# Altium PCB Boost converter.pcbdoc
Units mil, origin at the board's own origin, x right, y up, seen from the top; angles counter-clockwise.
Board outline 2320 x 1960 mil, 2 copper layers (Top Layer, Bottom Layer); 7 components, 5 nets, 23 pads, 0 vias.
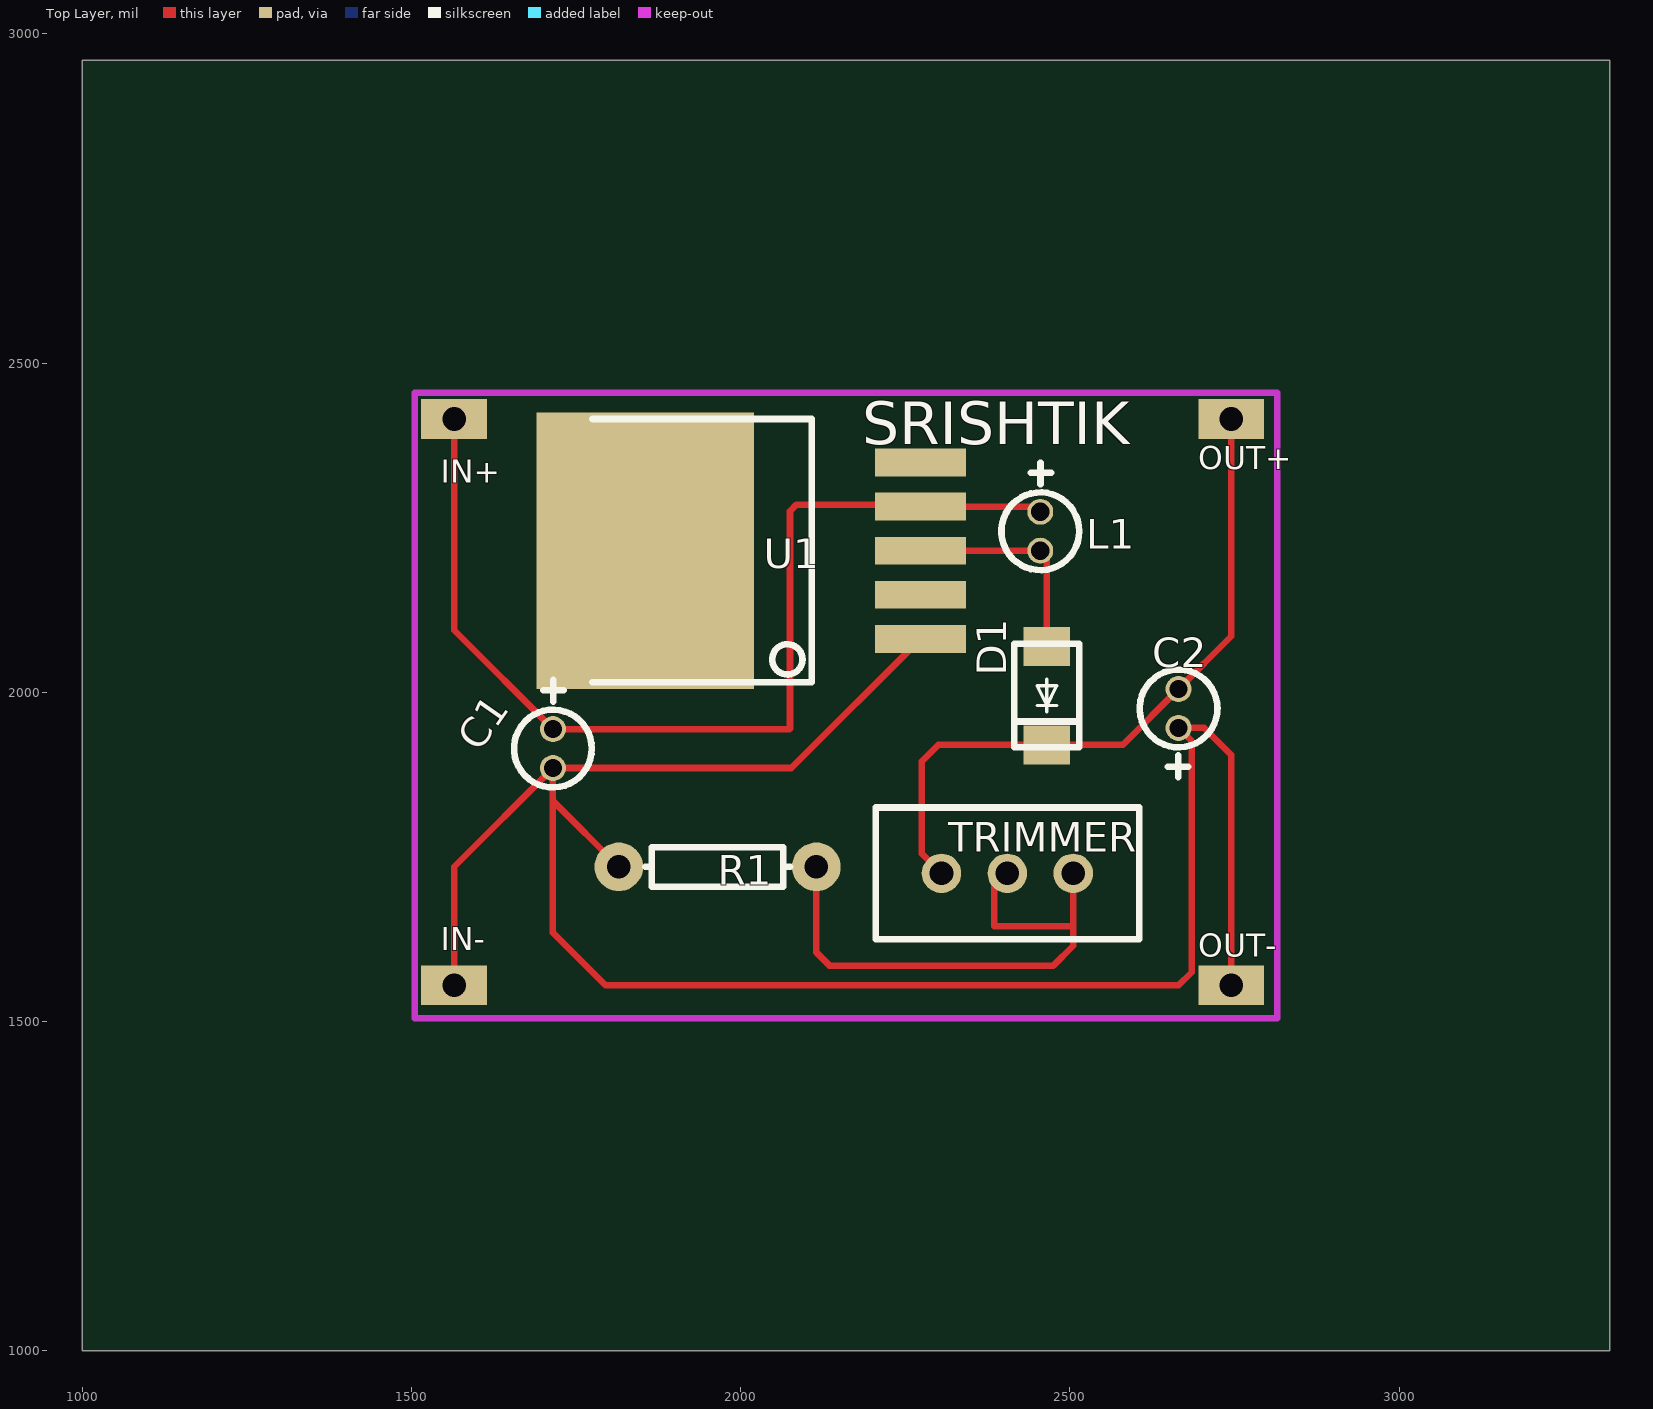
[diagram p0: Top Layer view]
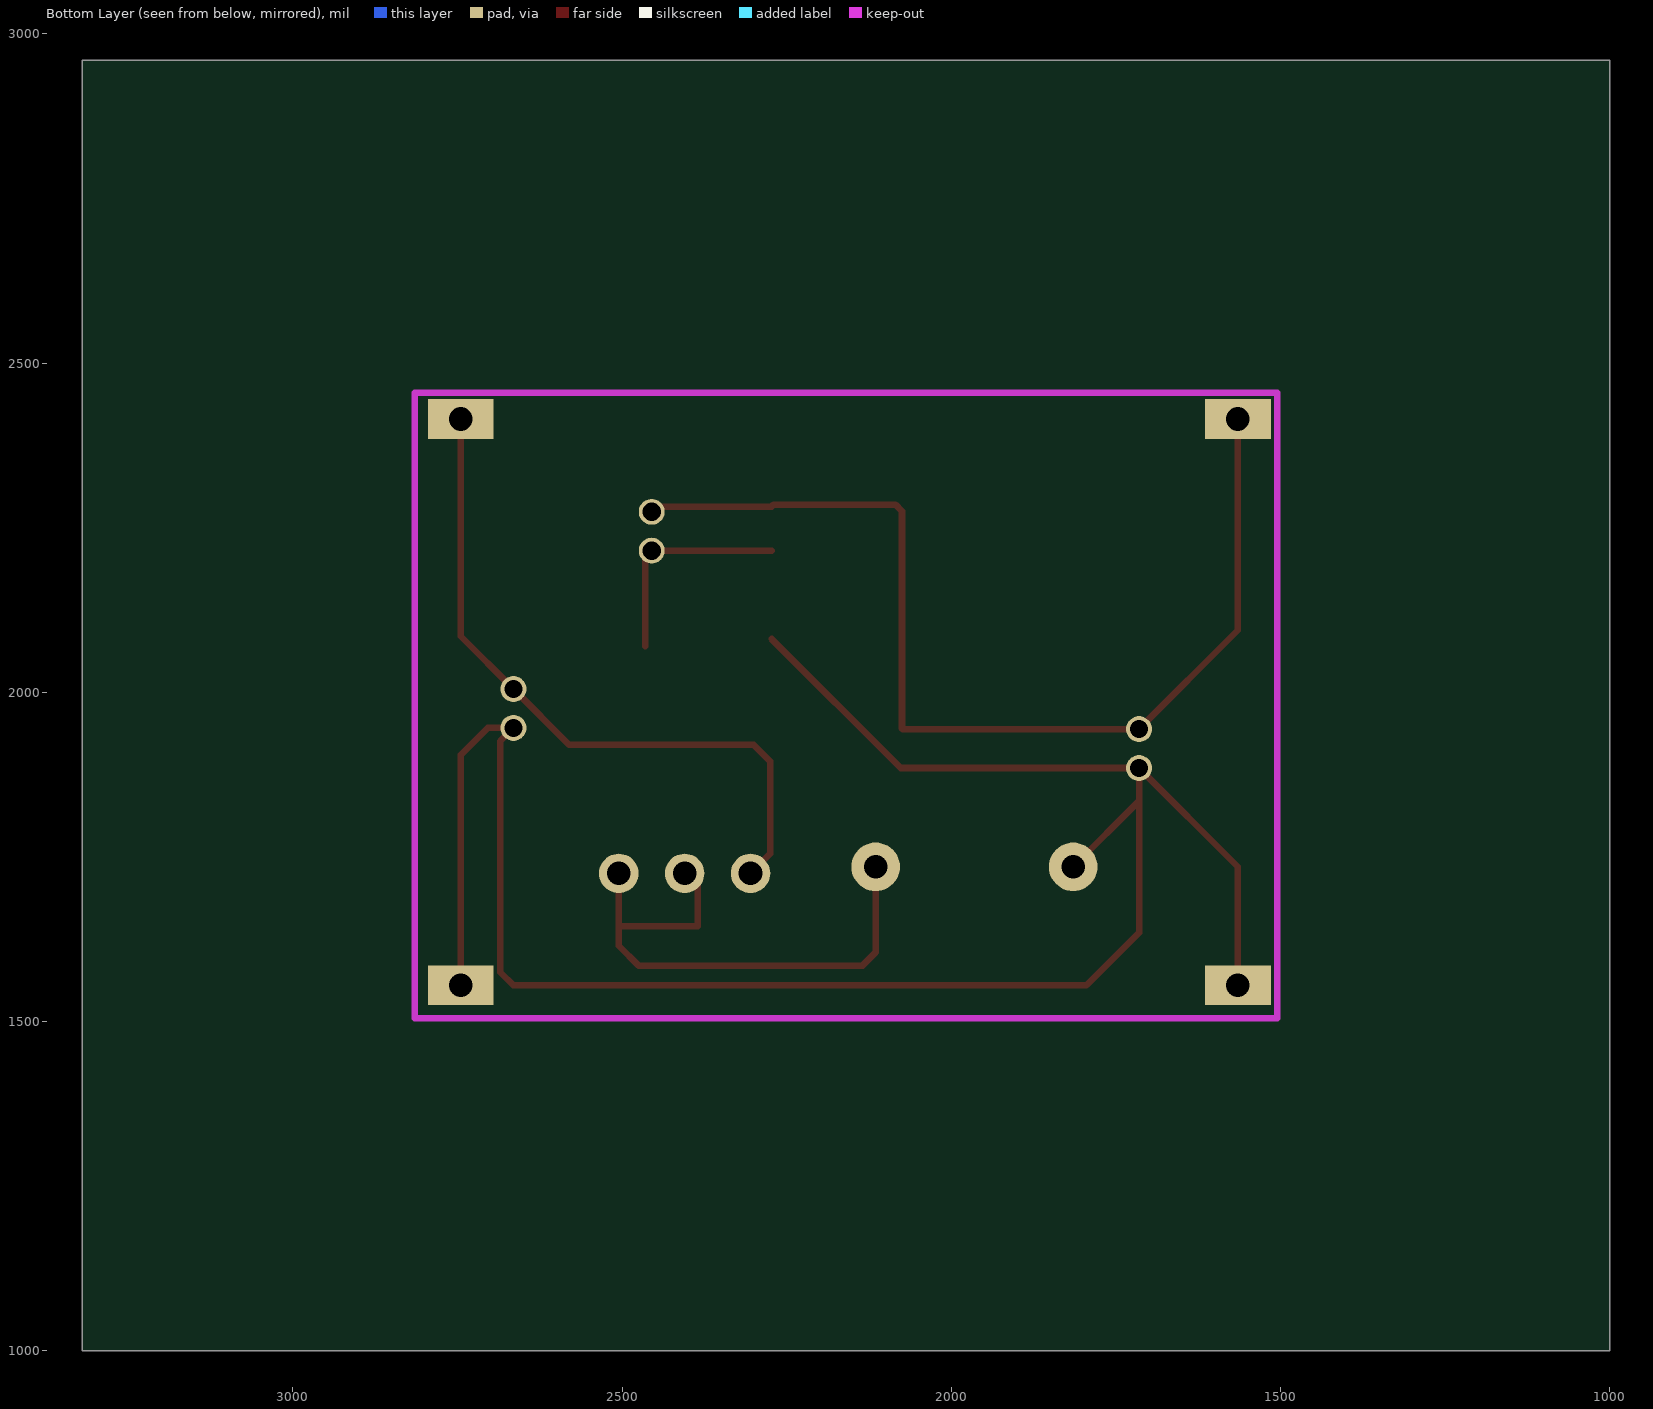
[diagram p1: Bottom Layer view, seen from below]

## Layer stack, top to bottom
Top Layer: signal copper (thickness not stored)
Dielectric: dielectric 12.6, FR-4, Dk 4.8
Bottom Layer: signal copper (thickness not stored)

## Board outline
3320,1000 1000,1000 1000,2960 3320,2960

## Components (designator, comment, footprint, x,y, rotation, side; value= is the part's Value field where it differs from the comment)
C1 "220uF" ?#1 1715,1885 r0 top
C2 "1u" ?#1 2665,2005 r180 top
D1 "SS34L RVG" ?#2 2465,1995 r270 top
L1 "33uH" ?#1 2455,2215 r0 top
R1 "1k" ?#3 2115,1735 r180 top
TRIMMER "TRIMMER" ?#4 2205,1825 r0 top
U1 "XL6009" ?#5 2255,2215 r0 top

## Footprints (in the part's own frame and the unit in brackets; to place one, negate y for a bottom-side part, rotate by r counter-clockwise, add the part's x,y. Pads: shape width x height; smd on the part's side, far side on the other; paste and mask are expansions set on the pad)
?#1 [mm]
  round 1 hole 0.7: 1(0,1.501) 2(0,0)
  silkscreen extent -1.5,-0.75 1.5,3.4
?#2 [mm]
  rect 1.5x1.8 smd: 1(-1.9,0) 2(1.9,0)
  silkscreen extent -2,-1.25 2,1.25
?#3 [mm]
  round 1.88 hole 0.899: 1(0,0) 2(7.62,0)
  silkscreen extent 1.02,-0.76 6.6,0.76
?#4 [mm]
  round 1.524 hole 0.914: 1(2.54,-2.54) 2(5.08,-2.54) 3(7.62,-2.54)
  silkscreen extent 0,-5.08 10.16,0
?#5 [mm]
  rect 3.5x1.069 smd: 1(0.457,-3.404) 2(0.457,-1.702) 3(0.457,0) 4(0.457,1.702) 5(0.457,3.404)
  rect 8.38x10.66 smd: 6(-10.16,0)
  silkscreen extent -12.19,-5.08 -3.73,5.08

## Free pads (board coordinates)
  rect 100x60 hole 36: 20(1565,2415) 21(1565,1555) 22(2745,2415) 23(2745,1555)

## Nets (pads, with @x,y where several pads share a name; then routed paths per layer and width w, separated by ;. In a path a pad name is that pad's centre, name@x,y a point inside that pad or via, vN(x,y) a via of type N, cw(c..) or ccw(c..) an arc to the next point about the centre after c; other vN are vias at no path point)
$BoardOutlineNet: 
S$157: C1.1 L1.1 pad.20 U1.4 | length 1612.1
  Top Layer w10: pad.20 1565,2094.1 C1.1 2074.1,1944.1 2075,1945 2075,2275 2085,2285 2270,2285 U1.4 2447.1,2282 L1.1
U1_1: C1.2 C2.1 C2.2 D1.2 pad.21 pad.22 pad.23 R1.1 R1.2 TRIMMER.1 TRIMMER.2 TRIMMER.3 U1.1 U1.5 | length 5302.1
  Top Layer w10: pad.21 1565,1735 C1.2 ; R1.2 1715,1835 C1.2 ; R1.1 2115,1605 2135,1585 2475,1585 2505,1615 TRIMMER.3 2505,1645 2385,1645 TRIMMER.2@2385,1725 ; U1.1 2077,1885 C1.2 ; TRIMMER.1 2275,1755 2275,1895 2300.19,1920.19 D1.2 2580.19,1920.19 C2.2 2745,2085 pad.22 ; pad.23 2745,1905 2704.1,1945.9 C2.1 2685,1925.9 2685,1575 2665,1555 1795,1555 1715,1635 1715,1825 C1.2
U1_2: U1.2
U1_3: D1.1 L1.2 U1.3 | length 337.2
  Top Layer w10: U1.3 L1.2 2465,2215 D1.1
pads on no net: U1.6

## Silkscreen, mask and mechanical layers (free items; w line width, h text height)
Top Overlay:
  text "SRISHTIK" at 2185,2377 h65
  text "OUT+" at 2695,2338.4 h35
  text "IN+" at 1545,2318.4 h35
  text "IN-" at 1545,1608.4 h35
  text "OUT-" at 2695,1598.4 h35
Document:
  lines w0.1: 2159,1979 2161,1981